# Altium PCB gecko3.PcbDoc (part 2 of 8)
Units mm, origin at the board's own origin, x right, y up, seen from the top; angles counter-clockwise.
Board outline 85.5 x 54.02 mm, 10 copper layers (Top Layer, MidLayer1, 1.2 & 2.5V Plane, GND Plane1, DDR layer 1, 3.3V Plane, DDR layer 2, GND Plane2, MidLayer2, Bottom Layer), stack 1.39 mm thick; 295 components, 567 nets, 2310 pads, 1568 vias.
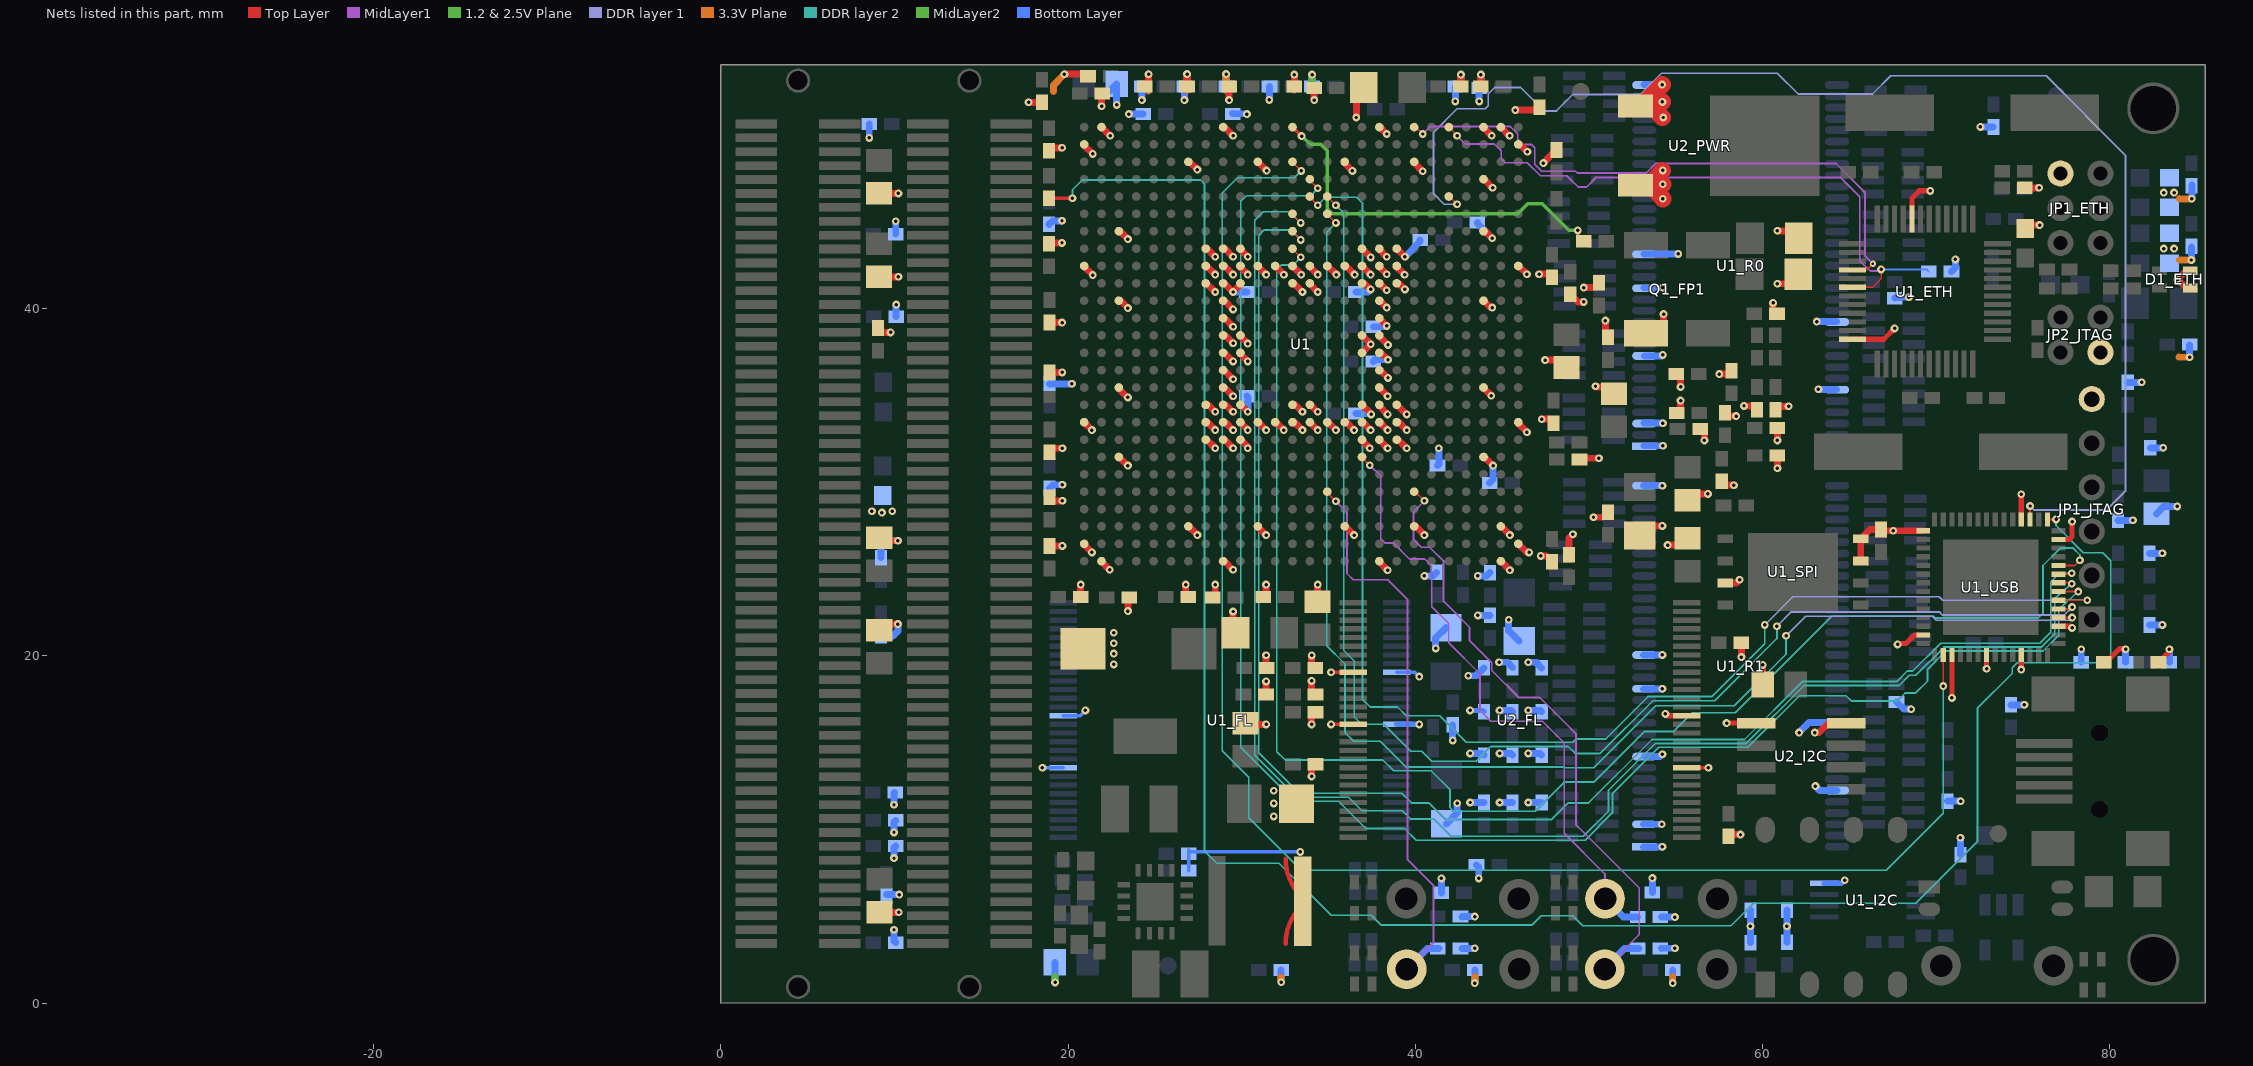
[diagram p10: the nets of this part, all layers, seen from the top]

## Footprints (in the part's own frame and the unit in brackets; to place one, negate y for a bottom-side part, rotate by r counter-clockwise, add the part's x,y. Pads: shape width x height; smd on the part's side, far side on the other; paste and mask are expansions set on the pad) (continued)
FG676 [mm] "676-Ball Fine-Pitch Ball Grid Array (FG676)"
  round 0.5 smd paste-0.15 mask+0.06: A1(-12.5,12.5) A2(-11.5,12.5) A3(-10.5,12.5) A4(-9.5,12.5) A5(-8.5,12.5) A6(-7.5,12.5) A7(-6.5,12.5) A8(-5.5,12.5) A9(-4.5,12.5) A10(-3.5,12.5) A11(-2.5,12.5) A12(-1.5,12.5) A13(-0.5,12.5) A14(0.5,12.5) A15(1.5,12.5) A16(2.5,12.5) A17(3.5,12.5) A18(4.5,12.5) A19(5.5,12.5) A20(6.5,12.5) A21(7.5,12.5) A22(8.5,12.5) A23(9.5,12.5) A24(10.5,12.5) A25(11.5,12.5) A26(12.5,12.5) AA1(-12.5,-7.5) AA2(-11.5,-7.5) AA3(-10.5,-7.5) AA4(-9.5,-7.5) AA5(-8.5,-7.5) AA6(-7.5,-7.5) AA7(-6.5,-7.5) AA8(-5.5,-7.5) AA9(-4.5,-7.5) AA10(-3.5,-7.5) AA11(-2.5,-7.5) AA12(-1.5,-7.5) AA13(-0.5,-7.5) AA14(0.5,-7.5) AA15(1.5,-7.5) AA16(2.5,-7.5) AA17(3.5,-7.5) AA18(4.5,-7.5) AA19(5.5,-7.5) AA20(6.5,-7.5) AA21(7.5,-7.5) AA22(8.5,-7.5) AA23(9.5,-7.5) AA24(10.5,-7.5) AA25(11.5,-7.5) AA26(12.5,-7.5) AB1(-12.5,-8.5) AB2(-11.5,-8.5) AB3(-10.5,-8.5) AB4(-9.5,-8.5) AB5(-8.5,-8.5) AB6(-7.5,-8.5) AB7(-6.5,-8.5) AB8(-5.5,-8.5) AB9(-4.5,-8.5) AB10(-3.5,-8.5) AB11(-2.5,-8.5) AB12(-1.5,-8.5) AB13(-0.5,-8.5) AB14(0.5,-8.5) AB15(1.5,-8.5) AB16(2.5,-8.5) AB17(3.5,-8.5) AB18(4.5,-8.5) AB19(5.5,-8.5) AB20(6.5,-8.5) AB21(7.5,-8.5) AB22(8.5,-8.5) AB23(9.5,-8.5) AB24(10.5,-8.5) AB25(11.5,-8.5) AB26(12.5,-8.5) AC1(-12.5,-9.5) AC2(-11.5,-9.5) AC3(-10.5,-9.5) AC4(-9.5,-9.5) AC5(-8.5,-9.5) AC6(-7.5,-9.5) AC7(-6.5,-9.5) AC8(-5.5,-9.5) AC9(-4.5,-9.5) AC10(-3.5,-9.5) AC11(-2.5,-9.5) AC12(-1.5,-9.5) AC13(-0.5,-9.5) AC14(0.5,-9.5) AC15(1.5,-9.5) AC16(2.5,-9.5) AC17(3.5,-9.5) AC18(4.5,-9.5) AC19(5.5,-9.5) AC20(6.5,-9.5) AC21(7.5,-9.5) AC22(8.5,-9.5) AC23(9.5,-9.5) AC24(10.5,-9.5) AC25(11.5,-9.5) AC26(12.5,-9.5) AD1(-12.5,-10.5) AD2(-11.5,-10.5) AD3(-10.5,-10.5) AD4(-9.5,-10.5) AD5(-8.5,-10.5) AD6(-7.5,-10.5) AD7(-6.5,-10.5) AD8(-5.5,-10.5) AD9(-4.5,-10.5) AD10(-3.5,-10.5) AD11(-2.5,-10.5) AD12(-1.5,-10.5) AD13(-0.5,-10.5) AD14(0.5,-10.5) AD15(1.5,-10.5) AD16(2.5,-10.5) AD17(3.5,-10.5) AD18(4.5,-10.5) AD19(5.5,-10.5) AD20(6.5,-10.5) AD21(7.5,-10.5) AD22(8.5,-10.5) AD23(9.5,-10.5) AD24(10.5,-10.5) AD25(11.5,-10.5) AD26(12.5,-10.5) AE1(-12.5,-11.5) AE2(-11.5,-11.5) AE3(-10.5,-11.5) AE4(-9.5,-11.5) AE5(-8.5,-11.5) AE6(-7.5,-11.5) AE7(-6.5,-11.5) AE8(-5.5,-11.5) AE9(-4.5,-11.5) AE10(-3.5,-11.5) AE11(-2.5,-11.5) AE12(-1.5,-11.5) AE13(-0.5,-11.5) AE14(0.5,-11.5) AE15(1.5,-11.5) AE16(2.5,-11.5) AE17(3.5,-11.5) AE18(4.5,-11.5) AE19(5.5,-11.5) AE20(6.5,-11.5) AE21(7.5,-11.5) AE22(8.5,-11.5) AE23(9.5,-11.5) AE24(10.5,-11.5) AE25(11.5,-11.5) AE26(12.5,-11.5) AF1(-12.5,-12.5) AF2(-11.5,-12.5) AF3(-10.5,-12.5) AF4(-9.5,-12.5) AF5(-8.5,-12.5) AF6(-7.5,-12.5) AF7(-6.5,-12.5) AF8(-5.5,-12.5) AF9(-4.5,-12.5) AF10(-3.5,-12.5) AF11(-2.5,-12.5) AF12(-1.5,-12.5) AF13(-0.5,-12.5) AF14(0.5,-12.5) AF15(1.5,-12.5) AF16(2.5,-12.5) AF17(3.5,-12.5) AF18(4.5,-12.5) AF19(5.5,-12.5) AF20(6.5,-12.5) AF21(7.5,-12.5) AF22(8.5,-12.5) AF23(9.5,-12.5) AF24(10.5,-12.5) AF25(11.5,-12.5) AF26(12.5,-12.5) B1(-12.5,11.5) B2(-11.5,11.5) B3(-10.5,11.5) B4(-9.5,11.5) B5(-8.5,11.5) B6(-7.5,11.5) B7(-6.5,11.5) B8(-5.5,11.5) B9(-4.5,11.5) B10(-3.5,11.5) B11(-2.5,11.5) B12(-1.5,11.5) B13(-0.5,11.5) B14(0.5,11.5) B15(1.5,11.5) B16(2.5,11.5) B17(3.5,11.5) B18(4.5,11.5) B19(5.5,11.5) B20(6.5,11.5) B21(7.5,11.5) B22(8.5,11.5) B23(9.5,11.5) B24(10.5,11.5) B25(11.5,11.5) B26(12.5,11.5) C1(-12.5,10.5) C2(-11.5,10.5) C3(-10.5,10.5) C4(-9.5,10.5) C5(-8.5,10.5) C6(-7.5,10.5) C7(-6.5,10.5) C8(-5.5,10.5) C9(-4.5,10.5) C10(-3.5,10.5) C11(-2.5,10.5) C12(-1.5,10.5) C13(-0.5,10.5) C14(0.5,10.5) C15(1.5,10.5) C16(2.5,10.5) C17(3.5,10.5) C18(4.5,10.5) C19(5.5,10.5) C20(6.5,10.5) C21(7.5,10.5) C22(8.5,10.5) C23(9.5,10.5) C24(10.5,10.5) C25(11.5,10.5) C26(12.5,10.5) D1(-12.5,9.5) D2(-11.5,9.5) D3(-10.5,9.5) D4(-9.5,9.5) D5(-8.5,9.5) D6(-7.5,9.5) D7(-6.5,9.5) D8(-5.5,9.5) D9(-4.5,9.5) D10(-3.5,9.5) D11(-2.5,9.5) D12(-1.5,9.5) D13(-0.5,9.5) D14(0.5,9.5) D15(1.5,9.5) D16(2.5,9.5) D17(3.5,9.5) D18(4.5,9.5) D19(5.5,9.5) D20(6.5,9.5) D21(7.5,9.5) D22(8.5,9.5) D23(9.5,9.5) D24(10.5,9.5) D25(11.5,9.5) D26(12.5,9.5) E1(-12.5,8.5) E2(-11.5,8.5) E3(-10.5,8.5) E4(-9.5,8.5) E5(-8.5,8.5) E6(-7.5,8.5) E7(-6.5,8.5) E8(-5.5,8.5) E9(-4.5,8.5) E10(-3.5,8.5) E11(-2.5,8.5) E12(-1.5,8.5) E13(-0.5,8.5) E14(0.5,8.5) E15(1.5,8.5) E16(2.5,8.5) E17(3.5,8.5) E18(4.5,8.5) E19(5.5,8.5) E20(6.5,8.5) E21(7.5,8.5) E22(8.5,8.5) E23(9.5,8.5) E24(10.5,8.5) E25(11.5,8.5) E26(12.5,8.5) F1(-12.5,7.5) F2(-11.5,7.5) F3(-10.5,7.5) F4(-9.5,7.5) F5(-8.5,7.5) F6(-7.5,7.5) F7(-6.5,7.5) F8(-5.5,7.5) F9(-4.5,7.5) F10(-3.5,7.5) F11(-2.5,7.5) F12(-1.5,7.5) F13(-0.5,7.5) F14(0.5,7.5) F15(1.5,7.5) F16(2.5,7.5) F17(3.5,7.5) F18(4.5,7.5) F19(5.5,7.5) F20(6.5,7.5) F21(7.5,7.5) F22(8.5,7.5) F23(9.5,7.5) F24(10.5,7.5) F25(11.5,7.5) F26(12.5,7.5) G1(-12.5,6.5) G2(-11.5,6.5) G3(-10.5,6.5) G4(-9.5,6.5) G5(-8.5,6.5) G6(-7.5,6.5) G7(-6.5,6.5) G8(-5.5,6.5) G9(-4.5,6.5) G10(-3.5,6.5) G11(-2.5,6.5) G12(-1.5,6.5) G13(-0.5,6.5) G14(0.5,6.5) G15(1.5,6.5) G16(2.5,6.5) G17(3.5,6.5) G18(4.5,6.5) G19(5.5,6.5) G20(6.5,6.5) G21(7.5,6.5) G22(8.5,6.5) G23(9.5,6.5) G24(10.5,6.5) G25(11.5,6.5) G26(12.5,6.5) H1(-12.5,5.5) H2(-11.5,5.5) H3(-10.5,5.5) H4(-9.5,5.5) H5(-8.5,5.5) H6(-7.5,5.5) H7(-6.5,5.5) H8(-5.5,5.5) H9(-4.5,5.5) H10(-3.5,5.5) H11(-2.5,5.5) H12(-1.5,5.5) H13(-0.5,5.5) H14(0.5,5.5) H15(1.5,5.5) H16(2.5,5.5) H17(3.5,5.5) H18(4.5,5.5) H19(5.5,5.5) H20(6.5,5.5) H21(7.5,5.5) H22(8.5,5.5) H23(9.5,5.5) H24(10.5,5.5) H25(11.5,5.5) H26(12.5,5.5) J1(-12.5,4.5) J2(-11.5,4.5) J3(-10.5,4.5) J4(-9.5,4.5) J5(-8.5,4.5) J6(-7.5,4.5) J7(-6.5,4.5) J8(-5.5,4.5) J9(-4.5,4.5) J10(-3.5,4.5) J11(-2.5,4.5) J12(-1.5,4.5) J13(-0.5,4.5) J14(0.5,4.5) J15(1.5,4.5) J16(2.5,4.5) J17(3.5,4.5) J18(4.5,4.5) J19(5.5,4.5) J20(6.5,4.5) J21(7.5,4.5) J22(8.5,4.5) J23(9.5,4.5) J24(10.5,4.5) J25(11.5,4.5) J26(12.5,4.5) K1(-12.5,3.5) K2(-11.5,3.5) K3(-10.5,3.5) K4(-9.5,3.5) K5(-8.5,3.5) K6(-7.5,3.5) K7(-6.5,3.5) K8(-5.5,3.5) K9(-4.5,3.5) K10(-3.5,3.5) K11(-2.5,3.5) K12(-1.5,3.5) K13(-0.5,3.5) K14(0.5,3.5) K15(1.5,3.5) K16(2.5,3.5) K17(3.5,3.5) K18(4.5,3.5) K19(5.5,3.5) K20(6.5,3.5) K21(7.5,3.5) K22(8.5,3.5) K23(9.5,3.5) K24(10.5,3.5) K25(11.5,3.5) K26(12.5,3.5) L1(-12.5,2.5) L2(-11.5,2.5) L3(-10.5,2.5) L4(-9.5,2.5) L5(-8.5,2.5) L6(-7.5,2.5) L7(-6.5,2.5) L8(-5.5,2.5) L9(-4.5,2.5) L10(-3.5,2.5) L11(-2.5,2.5) L12(-1.5,2.5) L13(-0.5,2.5) L14(0.5,2.5) L15(1.5,2.5) L16(2.5,2.5) L17(3.5,2.5) L18(4.5,2.5) L19(5.5,2.5) L20(6.5,2.5) L21(7.5,2.5) L22(8.5,2.5) L23(9.5,2.5) L24(10.5,2.5) L25(11.5,2.5) L26(12.5,2.5) M1(-12.5,1.5) M2(-11.5,1.5) M3(-10.5,1.5) M4(-9.5,1.5) M5(-8.5,1.5) M6(-7.5,1.5) M7(-6.5,1.5) M8(-5.5,1.5) M9(-4.5,1.5) M10(-3.5,1.5) M11(-2.5,1.5) M12(-1.5,1.5) M13(-0.5,1.5) M14(0.5,1.5) M15(1.5,1.5) M16(2.5,1.5) M17(3.5,1.5) M18(4.5,1.5) M19(5.5,1.5) M20(6.5,1.5) M21(7.5,1.5) M22(8.5,1.5) M23(9.5,1.5) M24(10.5,1.5) M25(11.5,1.5) M26(12.5,1.5) N1(-12.5,0.5) N2(-11.5,0.5) N3(-10.5,0.5) N4(-9.5,0.5) N5(-8.5,0.5) N6(-7.5,0.5) N7(-6.5,0.5) N8(-5.5,0.5) N9(-4.5,0.5) N10(-3.5,0.5) N11(-2.5,0.5) N12(-1.5,0.5) N13(-0.5,0.5) N14(0.5,0.5) N15(1.5,0.5) N16(2.5,0.5) N17(3.5,0.5) N18(4.5,0.5) N19(5.5,0.5) N20(6.5,0.5) N21(7.5,0.5) N22(8.5,0.5) N23(9.5,0.5) N24(10.5,0.5) N25(11.5,0.5) N26(12.5,0.5) P1(-12.5,-0.5) P2(-11.5,-0.5) P3(-10.5,-0.5) P4(-9.5,-0.5) P5(-8.5,-0.5) P6(-7.5,-0.5) P7(-6.5,-0.5) P8(-5.5,-0.5) P9(-4.5,-0.5) P10(-3.5,-0.5) P11(-2.5,-0.5) P12(-1.5,-0.5) P13(-0.5,-0.5) P14(0.5,-0.5) P15(1.5,-0.5) P16(2.5,-0.5) P17(3.5,-0.5) P18(4.5,-0.5) P19(5.5,-0.5) P20(6.5,-0.5) P21(7.5,-0.5) P22(8.5,-0.5) P23(9.5,-0.5) P24(10.5,-0.5) P25(11.5,-0.5) P26(12.5,-0.5) R1(-12.5,-1.5) R2(-11.5,-1.5) R3(-10.5,-1.5) R4(-9.5,-1.5) R5(-8.5,-1.5) R6(-7.5,-1.5) R7(-6.5,-1.5) R8(-5.5,-1.5) R9(-4.5,-1.5) R10(-3.5,-1.5) R11(-2.5,-1.5) R12(-1.5,-1.5) R13(-0.5,-1.5) R14(0.5,-1.5) R15(1.5,-1.5) R16(2.5,-1.5) R17(3.5,-1.5) R18(4.5,-1.5) R19(5.5,-1.5) R20(6.5,-1.5) R21(7.5,-1.5) R22(8.5,-1.5) R23(9.5,-1.5) R24(10.5,-1.5) R25(11.5,-1.5) R26(12.5,-1.5) T1(-12.5,-2.5) T2(-11.5,-2.5) T3(-10.5,-2.5) T4(-9.5,-2.5) T5(-8.5,-2.5) T6(-7.5,-2.5) T7(-6.5,-2.5) T8(-5.5,-2.5) T9(-4.5,-2.5) T10(-3.5,-2.5) T11(-2.5,-2.5) T12(-1.5,-2.5) T13(-0.5,-2.5) T14(0.5,-2.5) T15(1.5,-2.5) T16(2.5,-2.5) T17(3.5,-2.5) T18(4.5,-2.5) T19(5.5,-2.5) T20(6.5,-2.5) T21(7.5,-2.5) T22(8.5,-2.5) T23(9.5,-2.5) T24(10.5,-2.5) T25(11.5,-2.5) T26(12.5,-2.5) U1(-12.5,-3.5) U2(-11.5,-3.5) U3(-10.5,-3.5) U4(-9.5,-3.5) U5(-8.5,-3.5) U6(-7.5,-3.5) U7(-6.5,-3.5) U8(-5.5,-3.5) U9(-4.5,-3.5) U10(-3.5,-3.5) U11(-2.5,-3.5) U12(-1.5,-3.5) U13(-0.5,-3.5) U14(0.5,-3.5) U15(1.5,-3.5) U16(2.5,-3.5) U17(3.5,-3.5) U18(4.5,-3.5) U19(5.5,-3.5) U20(6.5,-3.5) U21(7.5,-3.5) U22(8.5,-3.5) U23(9.5,-3.5) U24(10.5,-3.5) U25(11.5,-3.5) U26(12.5,-3.5) V1(-12.5,-4.5) V2(-11.5,-4.5) V3(-10.5,-4.5) V4(-9.5,-4.5) V5(-8.5,-4.5) V6(-7.5,-4.5) V7(-6.5,-4.5) V8(-5.5,-4.5) V9(-4.5,-4.5) V10(-3.5,-4.5) V11(-2.5,-4.5) V12(-1.5,-4.5) V13(-0.5,-4.5) V14(0.5,-4.5) V15(1.5,-4.5) V16(2.5,-4.5) V17(3.5,-4.5) V18(4.5,-4.5) V19(5.5,-4.5) V20(6.5,-4.5) V21(7.5,-4.5) V22(8.5,-4.5) V23(9.5,-4.5) V24(10.5,-4.5) V25(11.5,-4.5) V26(12.5,-4.5) W1(-12.5,-5.5) W2(-11.5,-5.5) W3(-10.5,-5.5) W4(-9.5,-5.5) W5(-8.5,-5.5) W6(-7.5,-5.5) W7(-6.5,-5.5) W8(-5.5,-5.5) W9(-4.5,-5.5) W10(-3.5,-5.5) W11(-2.5,-5.5) W12(-1.5,-5.5) W13(-0.5,-5.5) W14(0.5,-5.5) W15(1.5,-5.5) W16(2.5,-5.5) W17(3.5,-5.5) W18(4.5,-5.5) W19(5.5,-5.5) W20(6.5,-5.5) W21(7.5,-5.5) W22(8.5,-5.5) W23(9.5,-5.5) W24(10.5,-5.5) W25(11.5,-5.5) W26(12.5,-5.5) Y1(-12.5,-6.5) Y2(-11.5,-6.5) Y3(-10.5,-6.5) Y4(-9.5,-6.5) Y5(-8.5,-6.5) Y6(-7.5,-6.5) Y7(-6.5,-6.5) Y8(-5.5,-6.5) Y9(-4.5,-6.5) Y10(-3.5,-6.5) Y11(-2.5,-6.5) Y12(-1.5,-6.5) Y13(-0.5,-6.5) Y14(0.5,-6.5) Y15(1.5,-6.5) Y16(2.5,-6.5) Y17(3.5,-6.5) Y18(4.5,-6.5) Y19(5.5,-6.5) Y20(6.5,-6.5) Y21(7.5,-6.5) Y22(8.5,-6.5) Y23(9.5,-6.5) Y24(10.5,-6.5) Y25(11.5,-6.5) Y26(12.5,-6.5)
  silkscreen extent -14.28,-13.5 13.5,13.5
FIDUCIAL1MM#1 [mm]
  round 1 smd: 0(0,0)
  round 1 on Top Paste: 0(0,0)
  round 2 on Top Solder: 0(0,0)
FIDUCIAL1MM#2 [mm]
  round 1 smd: 0(0,0)
  round 1 on Bottom Paste: 0(0,0)
  round 2 on Bottom Solder: 0(0,0)
  silkscreen extent -1,-1 1,1
FSM [mil] "Printtaster 3,5x6mm, FSM Alcoswitch"
  round 90 hole 51.18 paste-1.97 mask+2.36: 1(0,0) 2(255,0)
  silkscreen extent 10,-70 245,70
HDR1X6H-90° [mm]
  rect 1.5x1.5 hole 0.9: 1(0.105,-0.08)
  round 1.5 hole 0.9: 2(2.645,-0.08) 3(5.185,-0.08) 4(7.725,-0.08) 5(10.265,-0.08) 6(12.805,-0.08)
  silkscreen extent -1.17,-6.6 14.07,1.02
M22-2040205 [mm] "Harwin 2mm horizontal connector 2x2 pin"
  round 1.5 hole 0.8 paste-0.05 mask+0.06: 1(-1,-1.15) 2(-1,1.15) 3(1,-1.15) 4(1,1.15)
  silkscreen extent -2,-1.38 2,7.1
M22-2540305 [mm] "Harwin 2mm horizontal connector 2x3 pin"
  round 1.5 hole 0.8 paste-0.05 mask+0.06: 1(-2,-1.15) 2(-2,1.15) 3(0,-1.15) 4(0,1.15) 5(2,-1.15) 6(2,1.15)
  silkscreen extent -3,-1.38 2.98,7.1
MINIDIP2 [mm] "2 Way Dip Switch, 1,27 mm Spacing"
  rect 1.25x0.76 smd paste-0.05: 1(-0.75,0)
  oval 1.25x0.76 smd paste-0.05: 2(-0.75,-1.27) 3(6.9,-1.27) 4(6.9,0)
  silkscreen extent 1.46,-1.88 4.69,0.64
QFN8x8 [mm]
  oval 0.8x0.3 smd paste-0.05 mask+0.05: 1(0,0)
  rect 0.8x0.3 smd paste-0.05 mask+0.05: 2(0,-0.5) 3(0,-1) 4(0,-1.5) 5(0,-2) 6(0,-2.5) 7(0,-3) 8(0,-3.5) 9(0,-4) 10(0,-4.5) 11(0,-5) 12(0,-5.5) 13(0,-6) 14(0,-6.5) 29(7.8,-6.5) 30(7.8,-6) 31(7.8,-5.5) 32(7.8,-5) 33(7.8,-4.5) 34(7.8,-4) 35(7.8,-3.5) 36(7.8,-3) 37(7.8,-2.5) 38(7.8,-2) 39(7.8,-1.5) 40(7.8,-1) 41(7.8,-0.5) 42(7.8,0)
  rect 0.3x0.8 smd paste-0.05 mask+0.05: 15(0.65,-7.15) 16(1.15,-7.15) 17(1.65,-7.15) 18(2.15,-7.15) 19(2.65,-7.15) 20(3.15,-7.15) 21(3.65,-7.15) 22(4.15,-7.15) 23(4.65,-7.15) 24(5.15,-7.15) 25(5.65,-7.15) 26(6.15,-7.15) 27(6.65,-7.15) 28(7.15,-7.15) 43(7.15,0.65) 44(6.65,0.65) 45(6.15,0.65) 46(5.65,0.65) 47(5.15,0.65) 48(4.65,0.65) 49(4.15,0.65) 50(3.65,0.65) 51(3.15,0.65) 52(2.65,0.65) 53(2.15,0.65) 54(1.65,0.65) 55(1.15,0.65) 56(0.65,0.65)
  rect 5.5x5.5 smd paste-0.8 mask+0.05: 57(3.9,-3.25)
  silkscreen extent 0,-7.15 7.8,0.65
QFN16 [mm]
  oval 0.72x0.3 smd paste-0.05 mask+0.06: 1(-1.82,0.975)
  rect 0.72x0.3 smd paste-0.05 mask+0.06: 2(-1.82,0.325) 3(-1.82,-0.325) 4(-1.82,-0.975) 9(1.82,-0.975) 10(1.82,-0.325) 11(1.82,0.325) 12(1.82,0.975)
  rect 0.3x0.72 smd paste-0.05 mask+0.06: 5(-0.975,-1.82) 6(-0.325,-1.82) 7(0.325,-1.82) 8(0.975,-1.82) 13(0.975,1.795) 14(0.325,1.795) 15(-0.325,1.795) 16(-0.975,1.795)
  rect 2.15x2.15 smd paste-0.4 mask+0.06: 17(0,0)
  silkscreen extent -2,-2 2,2
SMD-VX3E [mil]
  rect 60x100 smd paste-1.97 mask+2.36: 1(-200,-120) 2(0,-120) 3(0,20) 4(-200,20)
  silkscreen extent -240,-150 40,50
SO-G8 [mm] "Small Outline; 8 Leads; Body Width 3.9 mm; Pitch 1.27 mm"
  rect 0.6x2.2 smd paste-0.05 mask+0.06: 1(-1.912,-2.595) 2(-0.617,-2.595) 3(0.628,-2.595) 4(1.898,-2.595) 5(1.898,2.587) 6(0.628,2.587) 7(-0.617,2.587) 8(-1.912,2.587)
  silkscreen extent -2.88,-2.72 2.5,1.1
stan-led4 [mm] "Stanley Duo LED, SMD"
  rect 0.5x0.85 smd paste-0.05 mask+0.06: 1(-0.5,0.875) 2(-0.5,-0.9) 3(0.5,0.875) 4(0.5,-0.9)
  silkscreen extent -0.65,-0.7 0.65,0.7
TESTPAD-SMD [mm] "SMD Testpad"
  rect 3.65x2.05 smd: 1(0,0)
TO-252 [mm]
  rect 1.3x2 smd paste-0.05 mask+0.06: 1(-2.26,-7.4) 3(2.31,-7.4)
  rect 5.8x6.3 smd paste-0.8 mask+0.06: 4(0.025,0.05)
  silkscreen extent -3.98,-9.27 4.03,3.5
TSOP66 [mm]
  rect 1.4x0.45 smd paste-0.05 mask+0.05: 1(-1.45,-1.05)
  oval 1.4x0.45 smd paste-0.05 mask+0.05: 2(-1.45,-1.7) 3(-1.45,-2.35) 4(-1.45,-3) 5(-1.45,-3.65) 6(-1.45,-4.3) 7(-1.45,-4.95) 8(-1.45,-5.6) 9(-1.45,-6.25) 10(-1.45,-6.9) 11(-1.45,-7.55) 12(-1.45,-8.2) 13(-1.45,-8.85) 14(-1.45,-9.5) 15(-1.45,-10.15) 16(-1.45,-10.8) 17(-1.45,-11.45) 18(-1.45,-12.1) 19(-1.45,-12.75) 20(-1.45,-13.4) 21(-1.45,-14.05) 22(-1.45,-14.7) 23(-1.45,-15.35) 24(-1.45,-16) 25(-1.45,-16.65) 26(-1.45,-17.3) 27(-1.45,-17.95) 28(-1.45,-18.6) 29(-1.45,-19.25) 30(-1.45,-19.9) 31(-1.45,-20.55) 32(-1.45,-21.2) 33(-1.45,-21.85) 34(9.65,-21.85) 35(9.65,-21.2) 36(9.65,-20.55) 37(9.65,-19.9) 38(9.65,-19.25) 39(9.65,-18.6) 40(9.65,-17.95) 41(9.65,-17.3) 42(9.65,-16.65) 43(9.65,-16) 44(9.65,-15.35) 45(9.65,-14.7) 46(9.65,-14.05) 47(9.65,-13.4) 48(9.65,-12.75) 49(9.65,-12.1) 50(9.65,-11.45) 51(9.65,-10.8) 52(9.65,-10.15) 53(9.65,-9.5) 54(9.65,-8.85) 55(9.65,-8.2) 56(9.65,-7.55) 57(9.65,-6.9) 58(9.65,-6.25) 59(9.65,-5.6) 60(9.65,-4.95) 61(9.65,-4.3) 62(9.65,-3.65) 63(9.65,-3) 64(9.65,-2.35) 65(9.65,-1.7) 66(9.65,-1.05)
  silkscreen extent -1.02,-22.9 9.22,0
TSOP-23-5 [mm]
  rect 0.62x1.22 smd paste-0.05 mask+0.06: 1(-0.971,-1.309) 2(-0.021,-1.309) 3(0.929,-1.309) 4(0.925,1.3) 5(-0.975,1.3)
  silkscreen extent -2.4,-2.33 1.58,2.07
TSSO3X6-G8/X.3 [mm]
  rect 0.3x1.65 smd paste-0.05 mask+0.06: 1(-0.975,-2.775) 2(-0.325,-2.775) 3(0.325,-2.775) 4(0.975,-2.775) 5(0.975,2.775) 6(0.325,2.775) 7(-0.325,2.775) 8(-0.975,2.775)
  silkscreen extent -1.8,-2.9 1.55,1.55
TSSO14X20-G56 [mm]
  rect 0.3x1.6 smd paste-0.05 mask+0.06: 1(-6.75,-9.6) 2(-6.25,-9.6) 3(-5.75,-9.6) 4(-5.25,-9.6) 5(-4.75,-9.6) 6(-4.25,-9.6) 7(-3.75,-9.6) 8(-3.25,-9.6) 9(-2.75,-9.6) 10(-2.25,-9.6) 11(-1.75,-9.6) 12(-1.25,-9.6) 13(-0.75,-9.6) 14(-0.25,-9.6) 15(0.25,-9.6) 16(0.75,-9.6) 17(1.25,-9.6) 18(1.75,-9.6) 19(2.25,-9.6) 20(2.75,-9.6) 21(3.25,-9.6) 22(3.75,-9.6) 23(4.25,-9.6) 24(4.75,-9.6) 25(5.25,-9.6) 26(5.75,-9.6) 27(6.25,-9.6) 28(6.75,-9.6) 29(6.75,9.6) 30(6.25,9.6) 31(5.75,9.6) 32(5.25,9.6) 33(4.75,9.6) 34(4.25,9.6) 35(3.75,9.6) 36(3.25,9.6) 37(2.75,9.6) 38(2.25,9.6) 39(1.75,9.6) 40(1.25,9.6) 41(0.75,9.6) 42(0.25,9.6) 43(-0.25,9.6) 44(-0.75,9.6) 45(-1.25,9.6) 46(-1.75,9.6) 47(-2.25,9.6) 48(-2.75,9.6) 49(-3.25,9.6) 50(-3.75,9.6) 51(-4.25,9.6) 52(-4.75,9.6) 53(-5.25,9.6) 54(-5.75,9.6) 55(-6.25,9.6) 56(-6.75,9.6)
  silkscreen extent -7.57,-9.73 7.05,8.4
USB_MINI_B_SMD [mm]
  rect 3.25x0.5 smd paste-0.05 mask+0.06: D+(0,-1.6) D-(0,-0.8) GND(0,-3.2) ID(0,-2.4) Vbus(0,0)
  rect 2.5x2 smd paste-0.05 mask+0.06: shield(-5.95,2.85) shield(-5.95,-6.05) shield(-0.5,2.85) shield(-0.5,-6.05)
  round 1 hole 1 paste-0.05 mask+0.06: ""(-3.2,0.6) ""(-3.2,-3.8)
  silkscreen extent -8.75,-5.45 0.65,2.25
VDFPN8 [mm] "VDFPN8, 8-Leads, Very thin Dual Flat Package Body 8.0x6.0mm (max), Pitch 1.27mm, IPC Medium Density"
  rect 0.5x0.9 smd: 1(1.905,3.9) 2(0.635,3.9) 3(-0.635,3.9) 4(-1.905,3.9) 5(-1.905,-3.9) 6(-0.635,-3.9) 7(0.635,-3.9) 8(1.905,-3.9)
  rect 4.5x5.2 smd paste-0.8: 9(0,0)
  silkscreen extent -3,-4 3,4.75

## Part data
1: library part "CC License"
C1_CNF C1_ETH C1_FL C1_FP1 C1_FP2 C1_PWR C1_R0 C1_R1 C2_CNF C2_ETH C2_FL C2_FP1 C2_FP2 C2_PWR C2_R0 C2_R1 C3_CNF C3_ETH C3_FL C3_PWR C4_CNF C4_ETH C4_FL C4_PWR C5_CNF C5_ETH C5_FL C5_PWR C5_USB C6_CNF C6_ETH C6_FL C6_PWR C6_USB C7_CNF C7_ETH C7_FL C7_USB C8_CNF C8_ETH C8_PWR C8_USB C9_CNF C9_ETH C9_PWR C9_USB C10_CNF C10_ETH C10_PWR C10_USB C11_CNF C11_ETH C11_PWR C11_USB C12_CNF C12_ETH C12_PWR C12_USB C13_CNF C13_ETH C13_PWR C13_USB C14_CNF C14_PWR C15_CNF C15_PWR C16_CNF C16_PWR C17_CNF C17_PWR C18_CNF C18_PWR C19_CNF C19_PWR C20_CNF C20_PWR C21_CNF C21_PWR C22_CNF C22_PWR C23_CNF C24_CNF C25_CNF C26_CNF C27_CNF C28_CNF C29_CNF C30_CNF C31_CNF C32_CNF C33_CNF C34_CNF C35_CNF C36_CNF C37_CNF C38_CNF C39_CNF C40_CNF C41_CNF C42_CNF C43_CNF C44_CNF C45_CNF C46_CNF C47_CNF C48_CNF C49_CNF C50_CNF C51_CNF C52_CNF C53_CNF C54_CNF C55_CNF C56_CNF C57_CNF C58_CNF C59_CNF C60_CNF C61_CNF C62_CNF C63_CNF C64_CNF C65_CNF C66_CNF C67_CNF C68_CNF C69_CNF C70_CNF C71_CNF C72_CNF C73_CNF C74_CNF C75_CNF C76_CNF C77_CNF C78_CNF C79_CNF C80_CNF C81_CNF C82_CNF C83_CNF C84_CNF C85_CNF C86_CNF C87_CNF C88_CNF C89_CNF C90_CNF C91_CNF C92_CNF C93_CNF C94_CNF C95_CNF C96_CNF C97_CNF C98_CNF: "Capacitor"
C2_IO: "Polarized Capacitor (Surface Mount)"
C2_USB C3_USB C4_USB: "Ceramic Chip Capacitor - Standard"
C7_PWR: "Solid Tantalum Chip Capacitor, T492 Series - CWR11 Style Per Mil-PRF-55365/8"
D1_ETH D1_I2C D1_SW D2_SW D3_SW D4_SW: "Stanley 1211C Bi-Color Ultra Compact SMT LED"
JP1_IO JP2_IO2: "AMP Free Height System, 0.8mm, 120 Pin, Plug"
JP1_IO2 JP2_IO: "AMP Free Height System, 0.8mm, 120 Pin, 9 or 13mm Height, Receptable"
JP1_JTAG: library part JTAG_CONNECTOR, "Header, 6-Pin,  Right Angle"
L1_PWR: library part COIL-SD-SERIE, "SD Series Coils from Coiltronics"
Q1_ETH Q1_USB: "SMD Quarz in the AT49 Case, like the ABLS series from Abracon"
Q1_FP1: library part QUARZ_OSZI_SMD, "TTL Quarz Oszillator"
R1_CNF R1_ETH R1_FL R1_FP1 R1_I2C R1_IO R1_JTAG R1_PWR R1_SW R1_USB R2_CNF R2_ETH R2_FL R2_FP1 R2_I2C R2_IO R2_JTAG R2_PWR R2_R0 R2_R1 R2_SW R2_USB R3_CNF R3_ETH R3_FL R3_I2C R3_JTAG R3_PWR R3_SW R3_USB R4_CNF R4_ETH R4_FL R4_PWR R4_SW R4_USB R5_ETH R5_PWR R5_SW R5_USB R6_PWR R6_SW R6_USB R7_PWR R7_SW R8_PWR R8_SW R9_ETH R9_SW R10_ETH R10_SW R11_ETH R11_SW R12_ETH R12_SW R13_ETH R13_SW R14_ETH R14_SW R15_ETH R15_SW R16_ETH R16_SW: "Resistor"
RA1_R0 RA1_R1 RA2_R0 RA2_R1 RA3_R0 RA3_R1 RA4_R0 RA4_R1 RA5_R0 RA5_R1 RA6_R0 RA6_R1 RA7_R0 RA7_R1 RA8_R0 RA8_R1 RA9_R0 RA9_R1 RA10_R0 RA10_R1 RA11_R0 RA11_R1: library part R_ARRAY_4_SMD
S1_SW S1_USB S2_SW S3_SW S4_SW: library part SW_PB
TP1_PWR: "Harwin SMD Testpad"
U1: library part XC3S1500-5FG676C, "Spartan-3 1.2V FPGA, 487 User I/Os, 676-ball FBGA, High Performance, Commercial Grade"
U1_ETH: "Single Port 10/100 Mb/s Ethernet Physical Layer Transceiver"
U1_FL U2_FL: "Intel embedded Flash J3"
U1_I2C: "4-bit I2C I/O Port"
U1_PWR: "3 A, 4 MHz, Step-Down Regulator"
U1_R0 U1_R1: "general model for ddr sdram's"
U1_SPI: "Serial Flash Memory, Low Voltage, 50 MHz SPI Bus"
U1_USB: library part EZ-USB-FX2_QFN
U2_PWR: "Low Dropout, Low IQ, 1.0A CMOS Linear Regulator"

## Free pads (board coordinates)
  round 3 hole 2.6 paste-0.05 mask+0.06: 0(82.5,2.5) 0(82.5,51.525)
  round 1 on Mech4: 1(78.85,40.775) 2(78.55,49.075) 3(84.5,19.6) 4(0.925,52.275) 5(10.875,51.725)
  round 0.5 on Mech4: 6(37.375,23.725) 7(47.65,24.275) 8(19.1,18.85) 9(23.325,3.35) 9(34.675,9.625) 10(69,19.9) 11(57.35,27.7) 11(60.325,16.975) 12(65.85,37.4) 13(52.8,36.9)

## Via types
v1: diameter 0.45, hole 0.2, Top Layer to Bottom Layer, tented both sides, 1470 vias
v2: diameter 0.45, hole 0.2, Top Layer to Bottom Layer, tented bottom, 62 vias
v3: diameter 0.35, hole 0.15, Top Layer to MidLayer1, tented both sides, 26 vias
v4: diameter 0.45, hole 0.2, MidLayer2 to Bottom Layer, tented both sides, 10 vias

## Nets (pads, with @x,y where several pads share a name; then routed paths per layer and width w, separated by ;. In a path a pad name is that pad's centre, name@x,y a point inside that pad or via, vN(x,y) a via of type N, cw(c..) or ccw(c..) an arc to the next point about the centre after c; other vN are vias at no path point)
1.2V: C6_PWR.1 C7_PWR.1 C45_CNF.2 C46_CNF.2 C47_CNF.2 C48_CNF.2 C49_CNF.2 C50_CNF.2 C51_CNF.2 C52_CNF.2 C53_CNF.2 C54_CNF.2 C55_CNF.2 C56_CNF.2 C57_CNF.2 C58_CNF.2 C59_CNF.2 C60_CNF.2 C61_CNF.2 C62_CNF.2 C63_CNF.2 C64_CNF.2 C65_CNF.2 C66_CNF.2 L1_PWR.2 R5_PWR.1 U1.H8 U1.H19 U1.J9 U1.J10 U1.J17 U1.J18 U1.K9 U1.K10 U1.K17 U1.K18 U1.U9 U1.U10 U1.U17 U1.U18 U1.V9 U1.V10 U1.V17 U1.V18 U1.W8 U1.W19 | length 44.3
  Top Layer w0.254: v1@29.434,40.956 v1(29.5,40.95)
  Top Layer w0.4: C52_CNF.2@18.897,43.724 18.948,43.775 v1(19.65,43.775) ; C62_CNF.2@18.924,39.192 v1(19.659,39.192) ; C61_CNF.2@18.942,36.322 v1(19.66,36.322) ; U1.H19@27.927,32.449 27.976,32.449 v1(28.475,31.95) ; U1.W19@27.927,43.449 28.001,43.449 v1(28.475,42.975) ; C51_CNF.2@28.341,23.359 28.475,23.493 v1(28.475,24.1) ; U1.J18@28.927,33.449 29.051,33.449 v1(29.5,33) ; U1.K18@28.927,34.449 29.101,34.449 v1(29.5,34.05) ; U1.U18@28.927,41.449 29.001,41.449 v1(29.5,40.95) 29.927,41.377 U1.U17@29.927,41.449 ; U1.V18@28.927,42.449 29.001,42.449 v1(29.5,41.95) ; C60_CNF.2@29.273,52.78 v1(29.275,52) ; v1(29.5,22.55) 29.5,21.475 C46_CNF.2@29.65,21.325 ; U1.J17@29.927,33.449 29.927,33.423 v1(30.35,33) ; U1.K17@29.927,34.449 29.951,34.449 v1(30.35,34.05) ; U1.V17@29.927,42.449 29.927,42.373 v1(30.35,41.95) ; C66_CNF.2@31.25,23.375 31.4,23.525 v1(31.4,24.1) ; v1(34.175,52) C63_CNF.2@34.175,52.725 ; C49_CNF.2@34.325,23.1 34.375,23.15 v1(34.375,24.1) ; v1(36.6,51) 36.6,52.3 C47_CNF.2@37.025,52.725 ; U1.J10@36.927,33.449 36.976,33.449 v1(37.425,33) ; U1.K10@36.927,34.449 v1@37.463,33.913 ; U1.U10@36.927,41.449 37.076,41.449 v1(37.425,41.1) ; U1.V10@36.927,42.448 v1(37.425,41.95) ; v1(37.45,33.9) v1@37.476,33.9 ; U1.J9@37.927,33.449 37.951,33.449 v1(38.4,33) ; U1.K9@37.927,34.449 37.927,34.373 v1(38.4,33.9) ; U1.U9@37.927,41.449 37.951,41.449 v1(38.35,41.05) ; U1.V9@37.927,42.449 37.927,42.398 v1(38.35,41.975) ; U1.H8@38.927,32.449 39.001,32.449 v1(39.5,31.95) ; U1.W8@38.927,43.449 v1(39.4,42.975) ; v1(47.475,37.025) 48.137,37.025 C48_CNF.2@48.565,36.597 ; C54_CNF.2@48.922,40.822 49.369,40.375 v1(49.7,40.375)
  Bottom Layer w0.2: C6_PWR.1@26.95,7.625 R5_PWR.1@26.95,8.6 ; R5_PWR.1@26.95,8.825 R5_PWR.1@26.95,8.6 ; v1@33.45,8.725 27.075,8.725 R5_PWR.1@26.95,8.6
  Bottom Layer w0.4: C50_CNF.2@22.4,52.525 C50_CNF.2@22.8,52.925 v1(22.8,51.725) ; v1(29.5,40.95) C59_CNF.2@30.3,40.95 ; C58_CNF.2@30.3,34.95 30.35,34.9 v1(30.35,34.05) ; C56_CNF.2@36.575,33.95 v1@37.43,33.95 ; C57_CNF.2@36.575,40.95 37.275,40.95 v1(37.425,41.1) ; v1(39.4,42.975) 40.275,43.85 C65_CNF.2@40.275,43.95 ; v1(40.525,24.6) 41.025,24.6 C55_CNF.2@41.225,24.8 ; v1(41.173,20.421) 41.173,21.024 C45_CNF.2@41.764,21.615 ; C64_CNF.2@41.275,30.95 41.35,31.025 v1(41.35,31.95) ; v1(43.675,51.925) 43.675,52 C53_CNF.2@43.675,52.775
  other v1: 33.375,8.7 31.85,10.75 31.85,11.5 31.85,12.225
2.5V: C1_FP1.2 C1_FP2.2 C1_R0.1 C1_R1.1 C8_PWR.1 C9_PWR.1 C11_PWR.2 C12_PWR.1 C13_PWR.1 C14_PWR.1 C16_PWR.1 C17_PWR.2 C18_PWR.1 C19_PWR.1 C20_PWR.1 C21_PWR.1 C67_CNF.2 C68_CNF.2 C69_CNF.2 C70_CNF.2 C71_CNF.2 C72_CNF.2 C73_CNF.2 C74_CNF.2 C75_CNF.2 C76_CNF.2 C77_CNF.2 C78_CNF.2 C79_CNF.2 C80_CNF.2 C81_CNF.2 C82_CNF.2 C83_CNF.2 C84_CNF.2 C85_CNF.2 C86_CNF.2 C87_CNF.2 C88_CNF.2 C89_CNF.2 C90_CNF.2 C91_CNF.2 C92_CNF.2 C93_CNF.2 C94_CNF.2 C95_CNF.2 C96_CNF.2 C97_CNF.2 C98_CNF.2 R1_CNF.1 R2_CNF.1 R6_PWR.2 U1.A2 U1.A9 U1.A18 U1.A25 U1.AC3 U1.AE1 U1.AE26 U1.AF2 U1.AF3 U1.AF9 U1.AF18 U1.AF25 U1.B1 U1.B26 U1.C2 U1.G3 U1.J1 U1.J8 U1.J26 U1.K8 U1.L3 U1.L9 U1.M9 U1.N9 U1.N10 U1.P9 U1.P10 U1.R9 U1.T3 U1.T9 U1.U8 U1.V1 U1.V8 U1.V26 U1.Y3 U1_R0.1 U1_R0.3 U1_R0.9 U1_R0.15 U1_R0.18 U1_R0.33 U1_R0.55 U1_R0.61 U1_R1.1 U1_R1.3 U1_R1.9 U1_R1.15 U1_R1.18 U1_R1.33 U1_R1.55 U1_R1.61 U2_PWR.1 | length 100.3
  Top Layer w0.4: C74_CNF.2@9.05,38.9 9.325,38.625 v1(9.775,38.625) ; C70_CNF.2@9.1,46.625 v1(10.225,46.625) ; v1(17.725,51.875) C76_CNF.2@18.5,51.875 ; C89_CNF.2@18.9,49.075 19.078,49.253 v1(19.659,49.253) ; C88_CNF.2@18.925,28.95 C88_CNF.2@18.995,28.88 ; C88_CNF.2@18.925,29.125 19.125,28.925 v1(19.675,28.925) ; C77_CNF.2@18.929,31.729 19.151,31.95 v1(19.675,31.95) ; C87_CNF.2@19.015,26.235 C87_CNF.2@18.925,26.325 v1(19.675,26.325) ; C86_CNF.2@20.725,23.35 v1(20.725,24.1) ; U1.B26@20.927,26.449 20.927,26.398 v1(21.375,25.95) ; U1.J26@20.927,33.449 v1(21.375,33) ; U1.V26@20.927,42.449 20.927,42.423 v1(21.425,41.925) ; U1.AE26@20.927,49.449 20.927,49.398 v1(21.425,48.9) ; U1.A25@21.927,25.449 21.927,25.423 v1(22.4,24.95) ; U1.AF25@21.927,50.449 v1(22.425,49.95) ; v1(21.927,51.649) 21.927,52.332 C90_CNF.2@21.97,52.376 ; v1(26.775,24.1) 26.776,23.526 C75_CNF.2@26.935,23.367 ; U1.A18@28.927,25.449 29.001,25.449 v1(29.5,24.95) ; U1.AF18@28.927,50.449 29.001,50.449 v1(29.5,49.95) ; U1.N10@36.927,37.449 36.934,37.449 v1(37.43,37.945) U1.P10@36.927,38.449 ; U1.A9@37.927,25.449 37.927,25.398 v1(38.4,24.925) ; U1.L9@37.927,35.449 37.927,35.423 v1(38.4,34.95) ; U1.M9@37.927,36.449 37.976,36.449 v1(38.425,36) ; U1.N9@37.927,37.449 38.026,37.449 v1(38.425,37.05) ; U1.P9@37.927,38.449 37.927,38.398 v1(38.425,37.9) ; U1.R9@37.927,39.449 37.927,39.423 v1(38.35,39) ; U1.T9@37.927,40.449 37.951,40.449 v1(38.35,40.05) ; U1.AF9@37.927,50.449 37.951,50.449 v1(38.35,50.05) ; U1.J8@38.927,33.449 39.051,33.449 v1(39.5,33) ; U1.K8@38.927,34.449 38.951,34.449 v1(39.5,33.9) ; U1.U8@38.927,41.449 39.051,41.449 v1(39.4,41.1) ; U1.V8@38.927,42.449 38.927,42.399 v1(39.38,41.945) ; R1_CNF.1@42.625,52.775 v1(42.625,53.475) ; C94_CNF.2@43.775,52.775 v1(43.775,53.475) ; U1.L3@43.925,35.45 43.925,35.425 v1(44.375,34.975) ; U1.G3@43.927,31.449 43.976,31.449 v1(44.475,30.95) ; U1.T3@43.927,40.449 44.326,40.05 v1(44.425,40.05) ; U1.Y3@43.927,44.449 44.026,44.449 v1(44.425,44.05) ; U1.AC3@43.927,47.449 43.951,47.449 v1(44.45,46.95) ; U1.AF3@43.927,50.449 43.927,50.423 v1(44.4,49.95) ; U1.A2@44.927,25.448 v1(45.45,24.925) ; U1.C2@44.927,27.449 44.951,27.449 v1(45.45,26.95) ; U1.AF2@44.927,50.449 v1(45.43,49.945) ; v1(45.75,51.425) 46.975,51.425 C93_CNF.2@47.15,51.6 ; U1.B1@45.927,26.449 46.426,25.95 v1(46.55,25.95) ; U1.J1@45.927,33.449 45.927,33.373 v1(46.425,32.875) ; U1.V1@45.927,42.449 45.951,42.449 v1(46.425,41.975) ; U1.AE1@45.927,49.449 46.026,49.449 v1(46.45,49.025) ; v1(47.125,41.975) 47.668,41.975 C81_CNF.2@47.856,41.787 ; v1(47.225,25.75) 47.55,25.75 C85_CNF.2@47.875,25.425 ; v1(47.275,33.625) 47.725,33.625 C82_CNF.2@47.951,33.399 ; v1(47.375,48.375) 48.081,49.131 C1_FP2.2@48.122,49.131 ; C83_CNF.2@48.85,25.775 48.85,26.772 v1(49.072,26.994) ; C1_FP1.2@49.45,31.3 49.525,31.375 v1@50.425,31.375 ; v1(49.7,41.2) 50.303,41.203 C21_PWR.1@50.575,41.475 ; v1(50.26,27.977) 50.82,27.977 C73_CNF.2@51.104,28.261 ; v1@50.425,35.475 51.065,35.475 C69_CNF.2@51.439,35.101 ; v1(50.95,39.3) 50.95,38.6 51.101,38.537 C72_CNF.2@51.101,38.334 ; C67_CNF.2@52.925,26.925 52.925,27.475 v1(54.225,27.475) ; v1(54.525,26.375) 55.276,26.375 C68_CNF.2@55.671,26.77 ; C19_PWR.1@55.055,36.228 55.276,36.006 v1(55.276,35.488) ; C14_PWR.1@56.377,33.045 56.65,33.045 v1(56.65,32.4) ; v1(57.5,36.225) 58.004,36.225 C20_PWR.1@58.204,36.425 ; C12_PWR.1@57.65,29.825 v1@58.348,29.825 ; v1(58.927,34.391) 59.455,34.391 R6_PWR.2@59.671,34.175 ; C71_CNF.2@60.001,18.348 v1@60.001,19.474 ; C11_PWR.2@60.746,34.175 60.937,34.366 v1(61.493,34.366) ; v1(60.85,32.4) C18_PWR.1@60.85,33.125 ; v1(60.85,41.425) 61.5,41.425 C17_PWR.2@62.05,41.975
  Top Layer w1: U2_PWR.1@52.675,51.66 U2_PWR.1@53.565,51.66 ; U2_PWR.1@52.921,51.606 v1(54.211,52.896) ; v1@54.225,51 U2_PWR.1@53.565,51.66 ; v1(54.225,51.9) 53.805,51.9 U2_PWR.1@53.565,51.66
  1.2 & 2.5V Plane w0.4: 19.25,1.525 19.255,1.52 v1(19.255,1.185) ; 34.05,52.75 v1(34.05,53.475) ; 42.625,52.675 v1(42.625,53.475) ; 43.775,52.625 v1(43.775,53.475) ; 54.2,52.625 54.211,52.636 v1(54.211,52.896)
  Bottom Layer w0.4: R2_CNF.1@18.9,44.85 19.1,45.05 v1(19.65,45.05) ; v1(19.255,1.185) C9_PWR.1@19.255,2.35 ; C91_CNF.2@26.696,52.776 26.695,52.774 v1@26.7,51.975 ; v1@31.59,52.015 C80_CNF.2@31.59,52.795 ; C92_CNF.2@34.05,52.725 v1(34.05,53.475) ; C98_CNF.2@37.575,36.95 37.675,37.05 v1(38.425,37.05) ; C97_CNF.2@37.575,38.95 v1@38.35,38.95 ; C13_PWR.1@41.5,6.35 v1(41.5,7.175) ; C8_PWR.1@41.795,10.321 42.408,10.933 v1(42.408,11.505) ; v1(42.3,51.925) C79_CNF.2@42.3,52.775 ; v1(43.15,14.375) 43.85,14.375 C78_CNF.2@43.95,14.275 ; C96_CNF.2@43.575,44.95 43.575,44.9 v1(44.425,44.05) ; v1(43.6,22.325) C84_CNF.2@44.3,22.325 ; C95_CNF.2@44.275,29.95 44.475,30.15 v1(44.475,30.95) ; U1_R1.1@53.136,8.996 v1(54.23,8.996) ; U1_R1.3@53.136,10.296 v1(54.186,10.296) ; U1_R1.15@53.136,18.096 v1(54.23,18.096) ; U1_R1.18@53.136,20.046 v1(54.23,20.046) ; U1_R1.33@53.136,29.796 v1(54.23,29.796) ; U1_R0.1@53.161,32.096 v1(54.255,32.096) ; U1_R0.3@53.161,33.396 v1(54.255,33.396) ; U1_R0.15@53.161,41.196 v1(54.255,41.196) ; U1_R0.18@53.161,43.146 v1(55.136,43.146) ; U1_R0.33@53.161,52.896 v1@54.255,52.896 ; U1_R1.9@53.186,14.196 54.096,14.196 v1(54.225,14.325) ; U1_R0.9@53.186,37.271 54.196,37.271 v1(54.25,37.325) ; C16_PWR.1@53.65,6.375 v1(53.65,7.2) ; v1(62.1,15.575) 62.671,16.146 U1_R1.55@64.236,16.146 ; v1(63.042,12.493) 63.289,12.246 U1_R1.61@64.286,12.246 ; v1(63.117,39.246) U1_R0.55@64.261,39.246 ; v1(63.211,35.346) U1_R0.61@64.261,35.346 ; C1_R0.1@67.609,40.596 v1(68.425,40.65) ; C1_R1.1@67.711,17.346 68.132,16.925 v1(68.55,16.925)
  other v1: 60,19.475 58.35,29.825 50.575,31.375 50.375,35.525 54.275,51 26.7,52 31.591,52.014
3.3V: C1_CNF.1 C1_ETH.2 C1_FL.2 C2_CNF.1 C2_ETH.2 C2_FL.2 C2_IO.1 C3_CNF.1 C3_ETH.2 C3_FL.2 C4_CNF.1 C4_FL.2 C5_CNF.1 C5_FL.2 C5_USB.1 C6_CNF.1 C6_FL.2 C6_USB.1 C7_CNF.2 C7_FL.2 C7_USB.1 C8_CNF.2 C8_USB.1 C9_CNF.2 C9_USB.1 C10_CNF.2 C10_PWR.2 C10_USB.1 C11_CNF.2 C11_ETH.2 C11_USB.1 C12_CNF.2 C12_ETH.2 C12_USB.1 C13_CNF.2 C13_USB.1 C14_CNF.2 C15_CNF.2 C16_CNF.2 C17_CNF.2 C18_CNF.2 C19_CNF.2 C20_CNF.2 C21_CNF.2 C22_CNF.2 C23_CNF.2 C24_CNF.2 C25_CNF.2 C26_CNF.2 C27_CNF.2 C28_CNF.2 C29_CNF.2 C30_CNF.2 C31_CNF.2 C32_CNF.2 C33_CNF.2 C34_CNF.2 C35_CNF.2 C36_CNF.2 C37_CNF.2 C38_CNF.2 C39_CNF.2 C40_CNF.2 C41_CNF.2 C42_CNF.2 C43_CNF.2 C44_CNF.2 D1_ETH.1 D1_ETH.3 FB2_IO.1 JP1_ETH.1 JP1_JTAG.6 JP2_JTAG.4 L1_ETH.1 Q1_FP1.4 R1_FL.1 R1_FP1.1 R1_IO.2 R2_IO.2 R2_USB.2 R3_FL.2 R3_I2C.2 R3_USB.2 R4_FL.2 R5_USB.2 R6_USB.2 R9_ETH.2 R9_SW.1 R10_SW.1 R11_SW.1 R12_ETH.2 R12_SW.1 R13_ETH.2 R13_SW.2 R14_ETH.2 R14_SW.2 R15_ETH.1 R15_SW.2 R16_ETH.1 R16_SW.2 U1.AD7 U1.AD11 U1.AD16 U1.AD20 U1.C7 U1.C11 U1.C16 U1.C20 U1.G24 U1.H9 U1.H10 U1.H17 U1.H18 U1.J11 U1.J12 U1.J13 U1.J14 U1.J15 U1.J16 U1.J19 U1.K13 U1.K14 U1.K19 U1.L18 U1.L24 U1.M18 U1.N17 U1.N18 U1.P17 U1.P18 U1.R18 U1.T18 U1.T24 U1.U13 U1.U14 U1.U19 U1.V11 U1.V12 U1.V13 U1.V14 U1.V15 U1.V16 U1.V19 U1.W9 U1.W10 U1.W17 U1.W18 U1.Y24 U1_ETH.32 U1_ETH.48 U1_FL.9 U1_FL.15 U1_FL.37 U1_FL.43 U1_I2C.8 U1_SPI.3 U1_SPI.7 U1_SPI.8 U1_USB.3 U1_USB.7 U1_USB.11 U1_USB.17 U1_USB.27 U1_USB.32 U1_USB.43 U1_USB.55 U2_FL.9 U2_FL.15 U2_FL.37 U2_FL.43 U2_I2C.1 U2_I2C.8 U2_PWR.3 | length 165.3
  Top Layer w0.2: v1(35.15,16.05) U2_FL.15@36.425,16.05 ; v1(35.15,19.05) U2_FL.9@36.425,19.05 ; U2_FL.37@55.575,13.55 v1(56.875,13.55)
  Top Layer w0.254: U1.K14@32.927,34.449 U1.K14@33.026,34.449
  Top Layer w0.3: v1(54.4,16.65) 54.5,16.55 U2_FL.43@55.625,16.55 ; v1(57.925,16.125) 59.617,16.125 U2_I2C.1@59.63,16.112 ; U1_ETH.48@65.175,38.225 66.975,38.225 v1(67.6,38.85) ; v1@67.775,20.7 68.25,20.7 68.75,21.2 U1_USB.55@69.25,21.2 ; U1_ETH.32@68.6,45.15 68.6,46.35 69.025,46.775 v1(69.65,46.775) ; v1(70.9,17.575) 70.9,17.8 U1_USB.3@70.9,20.05 ; v1(72.9,19.25) U1_USB.7@72.9,20.05 ; v1(74.9,19.2) U1_USB.11@74.9,20.05 ; U1_USB.32@74.9,27.85 v1(74.9,29.3) ; U1_USB.17@77.05,21.7 77.725,21.7 v1(77.825,21.6) ; U1_USB.27@77.05,26.7 77.675,26.7 77.825,26.85 v1(77.825,27.725) ; R2_USB.2@79.65,19.625 79.775,19.625 80.55,20.4 v1@80.95,20.4 ; R3_USB.2@82.8,19.625 83.425,20.25 v1(83.425,20.375)
  Top Layer w0.4: C2_CNF.1@9.1,41.825 v1(10.225,41.825) ; C3_CNF.1@9.125,21.475 9.475,21.825 v1(10.2,21.825) ; C1_CNF.1@9.125,26.8 9.3,26.625 v1(10.2,26.625) ; C5_CNF.1@9.15,5.337 C5_CNF.1@9.15,5.225 v1(10.25,5.225) ; v1(19.786,53.492) 21.033,53.492 C29_CNF.2@21.15,53.375 ; U1.G24@22.927,31.448 v1@23.425,30.95 ; U1.L24@22.927,35.449 22.927,35.373 v1@23.425,34.875 ; U1.T24@22.927,40.449 23.026,40.449 v1(23.45,40.025) ; U1.Y24@22.927,44.449 23.001,44.449 v1(23.45,44) ; v1(23.45,22.575) 23.45,23.275 R3_FL.2@23.525,23.35 ; C30_CNF.2@24.414,52.755 24.636,52.976 v1(24.636,53.495) ; C41_CNF.2@26.85,52.775 v1(26.85,53.5) ; U1.C20@26.927,27.449 26.951,27.449 v1(27.45,26.95) ; U1.AD20@26.927,48.449 27.001,48.449 v1(27.45,48) ; U1.J19@27.927,33.449 28.026,33.449 v1(28.475,33) ; U1.K19@27.927,34.449 28.076,34.449 v1(28.475,34.05) ; U1.U19@27.927,41.449 27.976,41.449 v1(28.475,40.95) ; U1.V19@27.927,42.449 27.976,42.449 v1(28.475,41.95) ; U1.H18@28.927,32.449 29.001,32.449 v1(29.5,31.95) ; U1.L18@28.927,35.449 29.001,35.449 v1(29.5,34.95) ; U1.M18@28.927,36.449 28.976,36.449 v1(29.5,35.925) ; U1.N18@28.927,37.449 29.001,37.449 v1(29.5,36.95) ; U1.P18@28.927,38.449 29.051,38.449 v1(29.5,38) ; U1.R18@28.927,39.449 29.001,39.449 v1(29.5,38.95) ; U1.T18@28.927,40.449 29.001,40.449 v1(29.5,39.95) ; U1.W18@28.927,43.449 29.026,43.449 v1(29.5,42.975) ; U1.H17@29.927,32.449 30.35,32.026 v1(30.35,31.95) ; U1.N17@29.927,37.449 29.927,37.373 v1(30.35,36.95) ; U1.P17@29.927,38.449 29.927,38.398 v1(30.35,37.975) ; U1.W17@29.927,43.449 29.927,43.398 v1(30.35,42.975) ; C4_CNF.1@30.225,16.125 30.3,16.05 v1(31.4,16.05) ; U1.C16@30.927,27.449 30.927,27.423 v1(31.4,26.95) ; U1.J16@30.927,33.449 30.951,33.449 v1(31.4,33) ; U1.V16@30.927,42.449 30.927,42.423 v1(31.4,41.95) ; U1.AD16@30.927,48.449 v1(31.43,47.945) ; C35_CNF.2@31.4,17.775 v1(31.4,18.525) ; v1(31.4,20.025) 31.4,19.4 C3_FL.2@31.5,19.3 ; U1.J15@31.927,33.449 31.976,33.449 v1(32.425,33) ; U1.V15@31.927,42.449 v1(32.43,41.945) ; U1.J14@32.927,33.449 33.051,33.449 v1(33.5,33) ; U1.K14@32.927,34.449 33.101,34.449 v1(33.5,34.05) ; U1.U14@32.927,41.449 33.001,41.449 v1(33.5,40.95) ; U1.V14@32.927,42.449 v1(33.43,41.945) ; R1_FP1.1@33.025,52.775 v1(33.025,53.475) ; U1.J13@33.927,33.449 v1(34.375,33) ; U1.K13@33.927,34.449 33.976,34.449 v1(34.375,34.05) ; U1.U13@33.927,41.449 33.927,41.398 v1(34.375,40.95) ; U1.V13@33.927,42.449 33.927,42.398 v1(34.375,41.95) ; v1(34.025,13.05) 34.025,13.525 C8_CNF.2@34.25,13.75 ; v1(34.025,16.05) 34.025,16.525 C40_CNF.2@34.25,16.75 ; v1(34.025,18.55) 34.025,18 C2_FL.2@34.25,17.775 ; v1(34.029,20.022) 34.029,19.496 C5_FL.2@34.231,19.294 ; U1.J12@34.927,33.449 34.976,33.449 v1(35.425,33) ; U1.V12@34.927,42.449 34.951,42.449 v1(35.45,41.95) ; U1.C11@35.927,27.449 35.976,27.449 v1(36.475,26.95) ; U1.J11@35.927,33.449 36.026,33.449 v1(36.475,33) ; U1.V11@35.927,42.449 36.001,42.449 v1(36.5,41.95) ; U1.AD11@35.927,48.449 35.927,48.373 v1(36.375,47.925) ; U1.H10@36.927,32.449 36.927,32.398 v1(37.375,31.95) ; U1.W10@36.927,43.449 v1(37.43,42.945) ; U1.H9@37.927,32.449 37.927,32.423 v1(38.4,31.95) ; U1.W9@37.927,43.449 37.927,43.398 v1(38.35,42.975) ; U1.C7@39.9,27.475 40,27.475 v1(40.525,26.95) ; U1.C7@39.927,27.449 U1.C7@39.952,27.449 ; U1.AD7@39.927,48.449 39.927,48.398 v1(40.425,47.9) ; Q1_FP1.4@53.292,38.667 Q1_FP1.4@53.292,38.57 53.497,38.775 54.075,38.775 54.298,38.998 54.298,39.423 v1(54.3,39.675) ; Q1_FP1.4@53.544,38.919 Q1_FP1.4@53.719,38.919 ; C37_CNF.2@55.075,33.975 55.275,34.175 v1(55.275,34.7) ; C6_CNF.1@55.675,28.95 55.675,29.325 v1(56.85,29.325) ; C36_CNF.2@57.7,34 57.9,33.8 v1(58.475,33.8) ; U1_SPI.3@57.85,24.19 58.49,24.19 v1(58.675,24.375) ; C12_CNF.2@58,9.6 58.1,9.7 v1(58.725,9.7) ; v1(58.775,19.925) R4_FL.2@58.775,20.75 ; v1(60.6,40.325) 60.597,39.791 C14_CNF.2@60.812,39.576 ; v1(60.85,30.8) C18_CNF.2@60.85,31.525 ; v1(60.85,44.475) 61.65,44.475 C10_PWR.2@62.075,44.05 ; v1(63,15.575) 63.25,15.575 63.787,16.112 U2_I2C.8@64.812,16.112 U2_I2C.8@64.8,16.1 ; U1_SPI.7@65.65,25.46 U1_SPI.8@65.65,26.73 66.195,27.275 R6_USB.2@66.825,27.275 66.9,27.2 v1(67.525,27.2) 67.775,27.2 U1_USB.43@69.25,27.2 ; R15_ETH.1@75.1,46.95 v1(75.925,46.95) ; L1_ETH.1@75.125,44.6 75.325,44.8 v1(75.95,44.8) ; D1_ETH.1@84.617,42.159 84.384,42.159 v1(83.9,41.675) 84.4,41.175 D1_ETH.3@84.625,41.175
  Top Layer w1: U2_PWR.3@52.675,47.09 U2_PWR.3@52.682,47.097 ; 53.771,47.389 v1@54.225,47.95 ; v1(54.25,46.325) 53.553,47.097 U2_PWR.3@52.682,47.097 ; v1(54.25,47.15) 54.224,47.15 U2_PWR.3@52.682,47.097
  3.3V Plane w0.4: 19.15,52.5 19.15,52.856 v1(19.786,53.492) ; 24.625,52.525 24.625,53.484 v1(24.636,53.495) ; 26.85,52.55 v1(26.85,53.5) ; 29.1,52.55 v1(29.1,53.5) ; v1(32.275,1.2) 32.275,1.5 ; 33.025,52.575 v1(33.025,53.475) ; v1(43.425,1.15) 43.425,1.525 ; v1(54.825,1.15) 54.825,1.525 ; 83.975,37.2 83.982,37.193 v1(84.592,37.193) ; 84,42.8 84.007,42.793 v1(84.692,42.793) ; 84,46.325 84.007,46.318 v1(84.717,46.318)
  Bottom Layer w0.2: v1(18.525,13.55) U1_FL.37@19.725,13.55 ; U1_FL.43@19.725,16.55 20.7,16.55 v1(21,16.85) ; U1_FL.9@38.925,19.05 39.975,19.05 v1(40.225,18.8)
  Bottom Layer w0.3: U1_FL.15@38.925,16.05 40.15,16.05 v1(40.225,16.05) ; v1(43.15,16.85) 43.875,16.85 C32_CNF.2@43.95,16.775 ; U1_I2C.8@63.55,6.9 64.55,6.9 v1(64.725,7.075)
  Bottom Layer w0.4: v1(8.55,49.825) C27_CNF.2@8.55,50.625 ; R2_IO.2@9.225,21.15 9.925,21.15 10.2,21.425 v1(10.2,21.825) ; R1_IO.2@9.225,25.65 9.225,26.325 9.525,26.625 v1(10.2,26.625) ; C7_CNF.2@9.55,6.25 v1(10.275,6.25) ; v1(9.975,4.225) 9.975,3.575 C16_CNF.2@10.075,3.475 ; v1(9.975,8.35) 9.975,8.95 C17_CNF.2@10.075,9.05 ; v1(9.975,9.825) 9.975,10.425 C9_CNF.2@10.075,10.525 ; v1(9.975,11.425) 9.975,12.1 C13_CNF.2@10,12.125 ; C38_CNF.2@10.075,44.275 v1(10.075,45.025) ; C39_CNF.2@10.1,39.525 v1(10.1,40.225) ; C26_CNF.2@18.925,29.65 19.12,29.845 v1(19.675,29.85) ; C22_CNF.2@18.925,35.661 v1(20.218,35.661) ; v1(23.5,51.2) C42_CNF.2@24.325,51.2 ; v1@24.25,51.975 v1(24.25,52) C28_CNF.2@24.25,52.775 ; v1(29.1,53.5) 29.11,52.775 29.11,52.76 C44_CNF.2@29.125,52.775 ; C25_CNF.2@29.475,51.225 v1(30.3,51.2) ; v1(32.275,1.2) C15_CNF.2@32.275,1.9 ; v1(42.15,15.125) R1_FL.1@42.15,16.025 ; R11_SW.1@42.675,3.15 v1(43.425,3.15) ; R12_SW.1@42.675,4.95 42.7,4.975 v1(43.425,4.975) ; v1(43.05,18.85) 43.5,18.85 C34_CNF.2@43.95,19.3 ; v1(43.15,11.55) C11_CNF.2@43.95,11.55 ; v1(43.425,1.15) C10_CNF.2@43.425,1.9 ; C20_CNF.2@43.525,7.95 43.65,7.825 v1(43.65,7.175) ; v1(43.593,24.596) 44.104,24.596 C24_CNF.2@44.294,24.786 ; v1(44.825,19.625) 45.3,19.625 C23_CNF.2@45.6,19.325 ; v1(44.85,11.55) C6_FL.2@45.6,11.55 ; v1(44.85,14.375) 45.5,14.375 C43_CNF.2@45.6,14.275 ; v1(44.85,16.85) 45.525,16.85 C33_CNF.2@45.6,16.775 ; v1(45.375,22.075) 45.361,21.464 C4_FL.2@45.981,20.844 ; v1(46.5,11.55) C7_FL.2@47.275,11.55 ; v1(46.5,14.375) 47.175,14.375 C1_FL.2@47.275,14.275 ; v1(46.5,16.85) 47.2,16.85 C21_CNF.2@47.275,16.775 ; v1(46.5,19.625) 46.95,19.625 C31_CNF.2@47.275,19.3 ; R9_SW.1@54.175,3.15 54.179,3.154 v1(54.95,3.15) ; R10_SW.1@54.175,4.95 v1(54.95,4.95) ; v1(54.825,1.15) C19_CNF.2@54.825,1.9 ; R13_SW.2@59.3,3.475 R14_SW.2@59.3,5.35 ; R15_SW.2@61.4,3.5 R16_SW.2@61.4,5.35 ; R5_USB.2@70.65,11.625 v1(71.4,11.625) ; R16_ETH.1@70.875,42.125 71.1,42.35 v1(71.1,42.825) ; R3_I2C.2@71.387,8.55 v1(71.394,9.519) ; v1(72.543,50.458) C3_ETH.2@73.275,50.458 ; C11_USB.1@74.3,17.175 v1(75.075,17.175) ; C8_USB.1@78.35,19.65 v1(78.35,20.375) ; C10_USB.1@80.475,27.8 v1(81.325,27.8) ; C13_USB.1@80.9,19.625 v1(80.9,20.375) ; C1_ETH.2@81.025,35.75 v1(81.825,35.75) ; C7_USB.1@82.275,21.775 v1(83.025,21.775) ; C6_USB.1@82.275,25.9 v1(83.025,25.9) ; C9_USB.1@82.325,31.975 v1(83.075,31.975) ; C5_USB.1@82.675,28.175 83.1,28.6 v1(83.875,28.6) ; C12_USB.1@83.425,19.625 v1(83.425,20.375) ; v1(84.592,37.193) C2_ETH.2@84.592,37.9 ; v1(84.692,42.793) C11_ETH.2@84.692,43.55 ; v1(84.717,46.318) C12_ETH.2@84.717,47.1
  other v1: 59.3,4.425 61.4,4.425 22.625,19.5 22.625,20.125 67.775,20.65 22.625,20.725 22.625,21.325 9.275,28.25 8.7,28.325 9.875,28.325 23.45,30.95 23.45,34.875 83.1,43.45 83.7,43.45 83.1,46.675 83.7,46.675 54.25,47.95
BUSY/RDYX: U1.AD14 U1_USB.2 | length 94.1
  Top Layer w0.1: U1.AD14@32.914,48.436 v1(33.425,47.925) ; v1(70.4,18.25) U1_USB.2@70.4,20.05
  DDR layer 2 w0.1: v1(33.425,47.925) 33.031,47.531 29.756,47.531 28.875,46.65 28.875,14.525 30.4,13 30.4,10.675 33.425,7.65 67.125,7.65 70.4,10.925 v1(70.4,18.25)
BUTTON0: R9_SW.2 S1_SW.1 U1.E7 | length 37.8
  Top Layer w0.1: U1.E7@39.927,29.449 40.001,29.449 v1(40.525,28.925)
  MidLayer1 w0.1: v1(40.525,28.925) 39.9,28.3 39.9,26.68 40.33,26.25 40.814,26.25 41.625,25.439 41.625,23.13 43.125,21.63 43.125,20.875 44.4,19.6 44.4,19.15 45.95,17.6 47.15,17.6 49.25,15.5 49.25,10.275 52.9,6.625 52.9,3.95 S1_SW.1@50.9,1.95
  Bottom Layer w0.4: S1_SW.1@50.856,1.969 52.037,3.15 R9_SW.2@52.875,3.15
BUTTON1: R10_SW.2 S2_SW.1 U1.G10 | length 36.1
  Top Layer w0.1: U1.G10@36.927,31.449 36.927,31.423 v1(37.375,30.975)
  MidLayer1 w0.1: v1(37.375,30.975) 38,30.375 38,26.75 38.25,26.5 38.725,26.5 39.65,25.575 40.534,25.575 40.95,25.159 40.95,22.83 41.925,21.855 41.925,20.75 43.725,18.95 43.725,16.85 44.35,16.225 47.325,16.225 48.575,14.975 48.575,9.775 50.925,7.425 S2_SW.1@50.925,6
  Bottom Layer w0.4: S2_SW.1@50.925,6 51.975,4.95 R10_SW.2@52.8,4.95
BUTTON2: R11_SW.2 S3_SW.1 U1.E12 | length 34.1
  Top Layer w0.1: U1.E12@34.927,29.449 34.927,29.398 v1(35.425,28.9)
  MidLayer1 w0.1: v1(35.425,28.9) 36.064,28.261 36.064,24.735 36.424,24.375 38.4,24.375 39.552,23.223 39.552,8.248 41.05,6.75 41.05,3.5 S3_SW.1@39.5,1.95
  Bottom Layer w0.4: S3_SW.1@39.691,1.961 39.691,2.141 40.7,3.15 R11_SW.2@41.375,3.15
CCLK: R3_CNF.1 U1_USB.29 | length 124.1
  Top Layer w0.1: U1_USB.29@76.4,27.85 76.444,27.806 76.5,27.825 76.475,27.85 v1(76.9,27.85)
  Top Layer w0.2: R3_CNF.1@18.9,46.35 19.65,46.35 v1(20.25,46.35)
  DDR layer 2 w0.1: v1(20.25,46.35) 20.25,46.825 20.825,47.4 27.625,47.4 27.85,47.175 27.85,8.78 28.58,8.05 32.15,8.05 35.15,5.05 37.45,5.05 38,4.5 46.725,4.5 47.25,5.025 49.075,5.025 49.647,4.453 58.181,4.453 59.478,5.75 68.825,5.75 72.369,9.294 72.369,16.969 74.375,18.975 74.375,19.3 74.675,19.6 79.647,19.6 80.047,20 80.047,25.472 79.591,25.928 78.472,25.928 76.9,27.5 v1(76.9,27.85)
CLK: R2_FP1.1 U1.AF14 | length 22.3
  Top Layer w0.2: U1.AF14@32.927,50.449 v1(33.45,49.926) ; v1@49.35,44.55 49.35,44.225 R2_FP1.1@49.7,43.875 ; R2_FP1.1@49.525,43.85 R2_FP1.1@49.65,43.725
  MidLayer2 w0.2: v1(33.45,49.926) 33.474,49.926 33.95,49.45 34.555,49.45 34.925,49.08 34.925,45.75 35.225,45.45 45.9,45.45 46.475,46.025 47.3,46.025 48.825,44.5 v1@49.3,44.5
  other v1: 49.35,44.5
COL: R16_ETH.2 U1.AF5 U1_ETH.42 | length 36.4
  Top Layer w0.1: U1.AF5@41.927,50.449 42.4,49.976 v1(42.4,49.95) ; U1_ETH.42@65.175,41.225 66.325,41.225 66.824,41.724 v1(66.824,42.249)
  MidLayer1 w0.1: v1(42.4,49.95) 42.875,49.475 44.55,49.475 44.95,49.075 44.95,48.625 45.175,48.4 46.455,48.4 47.205,47.65 48.725,47.65 49.375,47 49.875,47 50.425,47.55 64.475,47.55 65.6,46.425 65.6,42.755 66.193,42.162 66.737,42.162 v1(66.824,42.249)
  Bottom Layer w0.1: v1(66.824,42.249) 69.451,42.249 R16_ETH.2@69.575,42.125
CRS: U1.AF7 U1_ETH.40 | length 34.7
  Top Layer w0.1: U1.AF7@39.927,50.449 40.026,50.449 v1(40.425,50.05) ; U1_ETH.40@65.175,42.225 66,42.225 v3(66.35,42.575)
  MidLayer1 w0.1: v1(40.425,50.05) 40.85,50.475 45.48,50.475 45.9,50.055 45.9,49.75 46.2,49.45 46.675,49.45 46.875,49.25 46.875,48.305 47.28,47.9 49.225,47.9 49.325,47.8 53.3,47.8 53.853,48.353 64.222,48.353 65.9,46.675 65.9,43.025 v3(66.35,42.575)
CS_B/RDYU: U1.AB5 U1_USB.31 | length 77.6
  Top Layer w0.1: U1.AB5@41.927,46.449 41.951,46.449 v1(42.4,46) ; U1_USB.31@75.4,27.85 v1(75.4,28.625)
  DDR layer 1 w0.1: v1(42.4,46) 41.65,46 41.05,46.6 41.05,50.15 42.4,51.5 44.025,51.5 44.2,51.675 44.2,52.35 44.575,52.725 46.075,52.725 47.425,51.375 48.125,51.375 49.075,52.325 52.95,52.325 54.175,53.55 60.85,53.55 62.05,52.35 66.325,52.35 67.375,53.4 76.325,53.4 80.894,48.831 80.894,29.469 79.825,28.4 75.625,28.4 v1(75.4,28.625)
D0: U1.AA12 U1_USB.18 | length 78.6
  Top Layer w0.1: U1.AA12@34.927,45.423 v1(35.425,44.925) ; U1_USB.18@77.05,22.2 v1(77.825,22.2)
  DDR layer 1 w0.1: v1(61.35,21.15) 62.478,22.278 69.772,22.278 70,22.05 77.675,22.05 v1(77.825,22.2)
  DDR layer 2 w0.1: v1(35.425,44.925) 34.9,44.4 34.9,20.575 35.95,19.525 35.95,15.575 36.45,15.075 37.975,15.075 39.45,13.6 48.575,13.6 48.625,13.55 50.275,13.55 53.85,17.125 58.375,17.125 61.35,20.1 v1(61.35,21.15)
D1: U1.AB12 U1_USB.19 | length 78.4
  Top Layer w0.1: U1.AB12@34.927,46.449 v1(35.425,45.95) ; U1_USB.19@77.05,22.7 77.725,22.7 v1(77.825,22.8)
  DDR layer 1 w0.1: v1(60.825,21.7) 61.65,22.525 70.175,22.525 70.35,22.35 77.375,22.35 v1(77.825,22.8)
  DDR layer 2 w0.1: v1(35.425,45.95) 35.875,45.5 35.875,20.3 36.475,19.7 36.475,16.475 36.9,16.05 38.175,16.05 39.725,14.5 40.375,14.5 40.95,13.925 43.5,13.925 44.35,14.775 48.8,14.775 49.2,14.375 50.65,14.375 53.687,17.413 57.237,17.413 60.825,21 v1(60.825,21.7)
D2: U1.AB13 U1_USB.20 | length 80.8
  Top Layer w0.1: U1.AB13@33.927,46.449 33.927,46.398 v1(34.375,45.95) ; U1_USB.20@77.05,23.2 78.275,23.2 v1(78.7,23.2)
  DDR layer 1 w0.1: v1(60.125,21.775) 61.75,23.4 70.175,23.4 70.375,23.2 v1(78.7,23.2)
  DDR layer 2 w0.1: v1(34.375,45.95) 34.825,46.4 36.625,46.4 36.95,46.075 36.95,17.5 37.4,17.05 38.975,17.05 39.475,16.55 41.4,16.55 42.925,15.025 49.056,15.025 49.231,15.2 50.95,15.2 53.4,17.65 57.075,17.65 60.125,20.7 v1(60.125,21.775)
D3: U1.AC13 U1_USB.21 | length 96.5
  Top Layer w0.1: U1.AC13@33.927,47.449 33.927,47.373 v1(34.375,46.925) ; U1_USB.21@77.05,23.7 v1(78.175,23.7)
  DDR layer 2 w0.1: v1(34.375,46.925) 33.975,46.5 30.275,46.5 29.95,46.175 29.95,14.725 33.05,11.625 35.575,11.625 37.15,10.05 39.375,10.05 40.05,9.375 49.775,9.375 51.35,10.95 51.35,12.05 54.025,14.725 59.15,14.725 62.125,17.7 64.8,17.7 65.1,17.4 67.75,17.4 68.2,17.85 68.8,17.85 69.5,18.55 69.5,19.225 70.55,20.275 76.15,20.275 77.05,21.175 77.05,22.675 v1(78.175,23.7)
D4: U1.AA14 U1_USB.22 | length 92.3
  Top Layer w0.1: U1.AA14@32.927,45.449 32.927,45.398 v1(33.4,44.925) ; U1_USB.22@77.05,24.2 77.75,24.2 v1(77.8,24.15)
  DDR layer 2 w0.1: v1(33.4,44.925) 32.75,45.575 31.25,45.575 30.75,45.075 30.75,14.275 33.175,11.85 36.15,11.85 36.925,11.075 39.25,11.075 39.725,10.6 41.05,10.6 42.05,9.6 49.675,9.6 51.125,11.05 51.125,12.25 53.828,14.953 59.053,14.953 62.387,18.287 67.862,18.287 68.45,18.875 68.825,18.875 70.45,20.5 76.057,20.5 76.825,21.268 76.825,23.3 v1(77.8,24.15)
D5: U1.Y14 U1_USB.23 | length 90
  Top Layer w0.1: U1.Y14@32.927,44.449 32.927,44.423 v1(33.4,43.95) ; U1_USB.23@77.05,24.7 77.75,24.7 v1(77.8,24.75)
  DDR layer 2 w0.1: v1(33.4,43.95) 32.825,44.525 31.3,44.525 30.975,44.2 30.975,14.405 33.305,12.075 39.225,12.075 39.775,11.525 40.775,11.525 41.725,10.575 47.85,10.575 48.8,11.525 49.975,11.525 53.627,15.178 58.953,15.178 62.289,18.514 67.714,18.514 68.325,19.125 68.65,19.125 70.25,20.725 75.964,20.725 76.6,21.361 76.6,24.25 77.1,24.75 v1(77.8,24.75)
D6: U1.W14 U1_USB.24 | length 88.2
  Top Layer w0.1: U1.W14@32.927,43.449 32.927,43.423 v1(33.4,42.95) ; U1_USB.24@77.05,25.2 77.975,25.2 v1(78.275,25.5)
  DDR layer 2 w0.1: v1(33.4,42.95) 32.95,42.5 32.275,42.5 32.025,42.25 32.025,14.475 32.5,14 38.125,14 38.75,13.375 40.9,13.375 42,12.275 42,11.25 42.2,11.05 46.9,11.05 48.575,12.725 50.275,12.725 53.184,15.634 54.85,15.634 55.941,16.725 58.425,16.725 63.975,22.275 69.85,22.275 69.95,22.175 75.875,22.175 76.15,22.45 76.15,25.2 77.15,26.2 77.882,26.2 78.275,25.807 v1(78.275,25.5)